# Altium PCB A13-OLinuXino-MICRO_Rev_B_saved.PcbDoc (part 2 of 4)
Units mil, origin at the board's own origin, x right, y up, seen from the top; angles counter-clockwise.
Board outline 3950 x 3350 mil, 4 copper layers (Top, Route2, Route15, Bottom), stack 64.567 mil thick; 262 components, 264 nets, 1099 pads, 476 vias.
Unrouted connection lines stored in the file: 19.
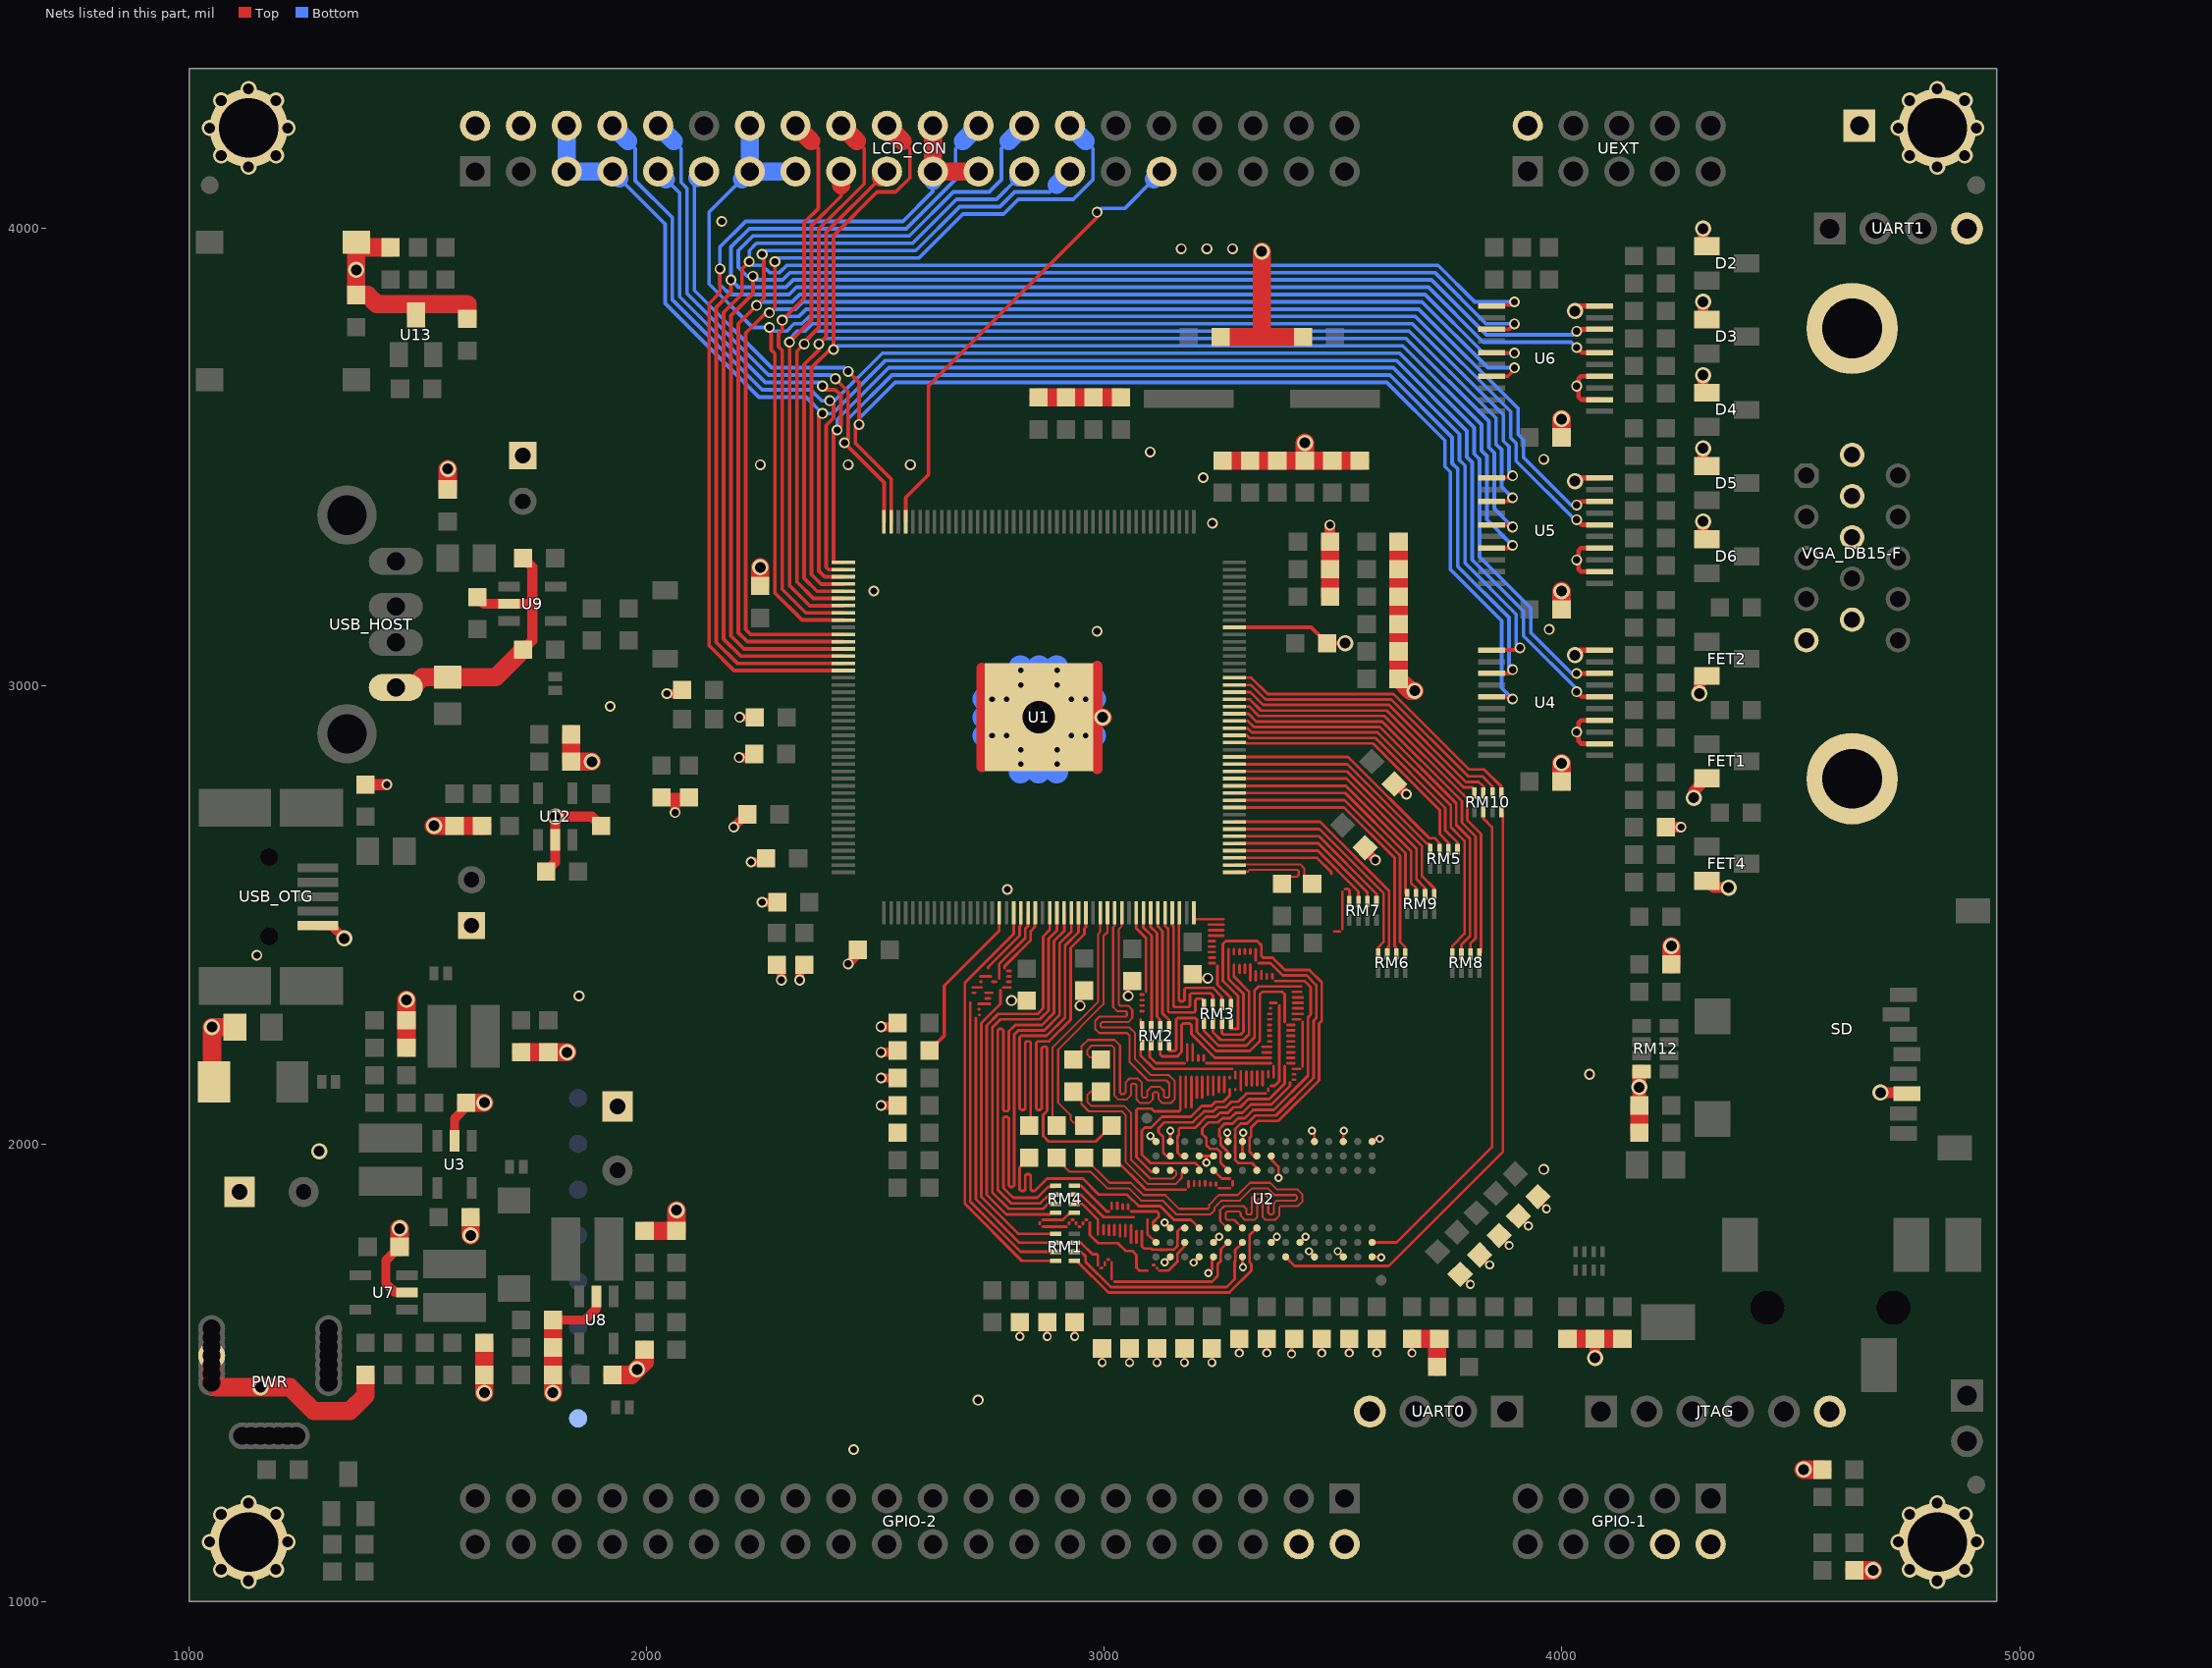
[diagram p4: the nets of this part, all layers, seen from the top]

## Via types
v1: diameter 23.75/23.75/23.75/23.75 (per signal layer), hole 15.75, Top to Bottom, 263 vias
v2: diameter 35.43/31.62/31.62/35.43 (per signal layer), hole 23.62, Top to Bottom, 120 vias
v3: diameter 19.81/19.81/19.81/19.81 (per signal layer), hole 11.81, Top to Bottom, 48 vias
v4: diameter 18/18/18/18 (per signal layer), hole 10, Top to Bottom, 41 vias
v5: diameter 169.92/137.92/137.92/169.92 (per signal layer), hole 129.92, Top to Bottom, 4 vias

## Nets (pads, with @x,y where several pads share a name; then routed paths per layer and width w, separated by ;. In a path a pad name is that pad's centre, name@x,y a point inside that pad or via, vN(x,y) a via of type N, cw(c..) or ccw(c..) an arc to the next point about the centre after c; other vN are vias at no path point) (continued)
D1: RM3.4.2 U2.F7 | length 953.6
  Top w5: 3222.84,1997.13 3222.84,2013.17 ; 3230.72,1989.26 3246.07,1989.26 ; 3254.34,1957.76 3254.34,1980.99
  Top w6: RM3.4.2@3217.47,2263.82 3217.47,2246.53 3249,2215 3310,2215 3328,2233 3328,2335 3337,2344 3429.5,2344 ; 3222.84,1997.13 3230.72,1989.26 ; 3222.84,2013.17 3214,2022.02 3214,2033.31 3227.69,2047 3248.61,2047 3257.61,2056 3275.2,2056 3287.2,2068 3302,2068 3320,2086 3365.3,2086 3406,2126.7 3406,2134 ; 3246.07,1989.26 3254.34,1980.99 ; 3254.34,1957.76 U2.F7@3270.09,1942.01 ; 3411.5,2284 3433,2284 ; 3412,2140 3416.5,2140 ; 3412,2152 3416.5,2152 ; 3412,2164 3427,2164 ; 3412,2296 3433,2296 ; 3412,2308 3433,2308 ; 3412,2320 3433,2320 ; 3412,2332 3429.5,2332 ; 3412.5,2272 3427,2272 ; 3433,2170 3433,2266
D2: RM1.2.2 U2.F2 | length 445.7
  Top w5: 3254.34,1744.18 3254.34,1760.91
  Top w6: RM1.2.2@2934.18,1783.84 2949.16,1783.84 2974,1759 2983,1759 2986,1756 2986,1735 ; 2992,1729 2995,1729 ; 3001,1735 3001,1741 ; 3007,1747 3010,1747 ; 3016,1705 3016,1741 ; 3022,1699 3235,1699 3247.45,1711.45 3247.45,1737.29 3254.34,1744.18 ; 3254.34,1760.91 3254.34,1769.34 3269.54,1784.54 U2.F2@3270.09,1784.53
D3: RM3.3.2 U2.F8 | length 986
  Top w5: 3254.34,1997.53 3254.34,2013.12
  Top w6: RM3.3.2@3237.16,2263.82 3237.16,2243.84 3254,2227 3304,2227 3316,2239 3316,2333 3283,2366 3283,2390.6 ; 3254.34,1997.53 3270.09,1981.78 U2.F8@3270.09,1973.51 ; 3254.34,2013.12 3251.19,2016.27 3251.19,2032.6 3262.59,2044 3280.2,2044 3292.2,2056 3307,2056 3325,2074 3370.29,2074 3445,2148.71 3445,2276.5 3451,2282.5 3451,2342 3437,2356 3373,2356 ; 3295,2374 3295,2390.6 ; 3307,2374 3307,2392 ; 3319,2357.5 3319,2392 ; 3331,2357.5 3331,2377 ; 3343,2362 3343,2377 ; 3355,2362 3355,2371 ; 3367,2362 3367,2371
D4: RM1.4.2 U2.H3 | length 536.7
  Top w5: 3317.33,1745.17 3317.33,1760.91 ; 3317.33,1776.66 3317.33,1792.41
  Top w6: RM1.4.2@2934.18,1744.47 2939.53,1744.47 3009,1675 3273.15,1675 3321.07,1722.92 3321.07,1737.49 3317.33,1741.23 3317.33,1745.17 ; 3317.33,1760.91 3317.33,1776.66 ; 3317.33,1792.41 3317.33,1800.28 U2.H3@3333.08,1816.03
D5: RM3.1.2 U2.H8 | length 978.9
  Top w5: 3317.33,1997.13 3317.33,2011.78 ; 3320.48,2018.5 3320.48,2033.12
  Top w6: RM3.1.2@3276.53,2263.82 3276.53,2251.47 3277,2251 3292,2251 3292,2323 3259,2356 3259,2437 3265,2443 3334,2443 3343,2434 3343,2410.5 3346.5,2407 3367.5,2407 3394.5,2380 3448,2380 3475,2353 3475,2269 3469,2263 3469,2138.7 3380.3,2050 3335.06,2050 3320.48,2035.43 3320.48,2033.12 ; 3317.33,1997.13 3317.33,1982.67 3326.49,1973.51 U2.H8@3333.08,1973.51 ; 3317.33,2011.78 3317.33,2013.22 3320.48,2016.37 3320.48,2018.5
D6: RM1.3.2 U2.G2 | length 483.7
  Top w5: 3285.83,1744.18 3285.83,1760.91
  Top w6: RM1.3.2@2934.18,1764.16 2948.84,1764.16 2959,1754 2959,1742 3014,1687 3267,1687 3284.46,1704.46 3284.46,1742.8 3285.83,1744.18 ; 3285.83,1760.91 3285.83,1767.83 3301.58,1783.58 U2.G2@3301.59,1784.53
D7: RM3.2.2 U2.H7 | length 1025.4
  Top w5: 3285.83,1965.17 3285.83,1981.39 ; 3285.83,1997.13 3285.83,2012.88 ; 3285.83,2018.49 3285.83,2030.64 ; 3293.24,1957.76 3317.33,1957.76
  Top w6: RM3.2.2@3256.84,2263.82 3256.84,2242.16 3260,2239 3298,2239 3304,2245 3304,2328 3271,2361 3271,2425 ; 3283,2414.6 3283,2425 ; 3285.83,1965.17 3293.24,1957.76 ; 3285.83,1981.39 3285.83,1997.13 ; 3285.83,2012.88 3285.83,2018.49 ; 3285.83,2030.64 3285.83,2032.66 3297.17,2044 3312,2044 3330,2062 3375.3,2062 3457,2143.7 3457,2269 3463,2275 3463,2347 3442,2368 3389.5,2368 3362.5,2395 3337,2395 ; 3295,2414.6 3295,2425 ; 3307,2416 3307,2425 ; 3317.33,1957.76 3322.74,1957.76 3333.08,1947.42 U2.H7@3333.08,1942.01 ; 3319,2416 3319,2425 ; 3331,2401 3331,2425
D8: RM2.3.2 U2.D7 | length 975.1
  Top w5: 3105.52,1957.76 3120.48,1957.76 ; 3136.23,1957.76 3151.98,1957.76 ; 3167.72,1957.76 3183.47,1957.76
  Top w6: RM2.3.2@3102.16,2215.82 3102.16,2209.16 3099.2,2206.2 3099.2,2189.8 3113,2176 3175,2176 ; 3105.52,1957.76 3100.8,1957.76 3082,1976.56 3082,2029 3088.3,2035.3 3102.3,2035.3 3126,2059 3188.69,2059 3212.69,2083 3233.6,2083 3242.6,2092 3260.2,2092 3274,2105.8 3274,2119 ; 3120.48,1957.76 3136.23,1957.76 ; 3151.98,1957.76 3167.72,1957.76 ; 3181,2182 3181,2217 ; 3183.47,1957.76 3198.74,1957.76 3207.09,1949.41 U2.D7@3207.1,1942.01 ; 3193,2182 3193,2217 ; 3205,2182 3205,2193.5 ; 3217,2182 3217,2193.5 ; 3223,2176 3364,2176 ; 3286,2117.5 3286,2119 ; 3298,2117.5 3298,2158 ; 3310,2128 3310,2158 ; 3322,2128 3322,2158 ; 3334,2128 3334,2158 ; 3346,2128 3346,2158 ; 3358,2145.4 3358,2158 ; 3370,2145.4 3370,2170
D9: RM4.3.2 U2.C3 | length 437.2
  Top w5: 3104.23,1768.79 3120.48,1768.79 ; 3136.23,1768.79 3151.58,1768.79 ; 3159.85,1777.06 3159.85,1792.41
  Top w6: RM4.3.2@2934.18,1869.16 2950.84,1869.16 2986,1834 2986,1803 ; 2998,1803 2998,1822 ; 3010,1801 3010,1822 ; 3022,1801 3022,1822 ; 3034,1798 3034,1822 ; 3046,1798 3046,1822 ; 3058,1784 3058,1822 ; 3070,1784 3070,1809 ; 3082,1809 3082,1776 3087,1771 3102.02,1771 3104.23,1768.79 ; 3120.48,1768.79 3136.23,1768.79 ; 3151.58,1768.79 3159.85,1777.06 ; 3159.85,1792.41 3160,1792.56 3160,1809 3167.03,1816.03 U2.C3@3175.6,1816.03
D10: RM2.1.2 U2.C8 | length 1057.4
  Top w5: 3159.85,1997.13 3159.85,2012.88
  Top w6: RM2.1.2@3141.53,2215.82 3141.53,2203.47 3142,2203 3154,2203 3157,2206 3157,2272 3160,2275 3199,2275 3202,2272 3202,2245 3244,2203 3317.5,2203 3340,2225.5 3340,2327 3345,2332 3389,2332 3394,2327 3394,2266 ; 3159.85,1997.13 3159.85,1980.65 3166.99,1973.51 U2.C8@3175.6,1973.51 ; 3159.85,2012.88 3159.85,2016.82 3162.61,2019.57 3162.61,2032.11 3165.5,2035 3198.71,2035 3222.71,2059 3243.6,2059 3252.6,2068 3270.19,2068 3282.19,2080 3297,2080 3315,2098 3360.31,2098 3394,2131.69 3394,2170 ; 3400,2176 3415,2176 ; 3400,2188 3415,2188 ; 3400,2200 3415,2200 ; 3400,2212 3415,2212 ; 3400,2224 3415,2224 ; 3400,2236 3415,2236 ; 3400,2248 3415,2248 ; 3400,2260 3415,2260
D11: RM4.4.2 U2.C2 | length 450.1
  Top w5: 3159.85,1743.24 3159.85,1760.52
  Top w6: 2859,1825 2859,1828 ; 2865,1819 2917,1819 ; 2865,1834 2909.5,1834 2924.97,1849.47 RM4.4.2@2934.18,1849.47 ; 2923,1825 2923,1828 ; 2929,1834 2932,1834 ; 2938,1825 2938,1828 ; 2944,1819 2947,1819 ; 2953,1825 2953,1828 ; 2959,1834 2962,1834 ; 2968,1828 2968,1801 2986,1783 3029.5,1783 3046.5,1766 3061,1766 3070,1757 3070,1729.5 3076.5,1723 3094,1723 ; 3106,1735 3109,1735 ; 3115,1728 3115,1729 ; 3120,1723 3139.61,1723 3159.85,1743.24 ; 3159.85,1760.52 3174.02,1774.69 3174.02,1782.96 U2.C2@3175.6,1784.53
D12: RM2.4.2 U2.A7 | length 950.4
  Top w6: RM2.4.2@3082.47,2215.82 3079,2212.35 3079,2193 3108,2164 3279,2164 ; U2.A7@3112.61,1942.01 3109.59,1939 3102,1939 3070,1971 3070,2074 3073,2077 3103,2077 3109,2071 3163,2071 3166,2074 3166,2146 ; 3178,2080 3178,2146 ; 3190,2080 3190,2146 ; 3202,2101 3202,2146 ; 3214,2101 3214,2146 ; 3226,2107 3226,2146 ; 3238,2107 3238,2146 ; 3250,2113.5 3250,2146 ; 3262,2113.5 3262,2146 ; 3274,2143.5 3274,2146 ; 3286,2143.5 3286,2157
D13: RM4.2.2 U2.A2 | length 207.2
  Top w6: RM4.2.2@2934.18,1888.84 2948.66,1888.84 2997.5,1840 3064,1840 ; 3094,1834 3094,1803.14 U2.A2@3112.61,1784.53
D14: RM2.2.2 U2.B8 | length 993
  Top w5: 3128.35,1997.13 3128.35,2012.88
  Top w6: RM2.2.2@3121.84,2215.82 3121.84,2195.16 3126,2191 3159.5,2191 3169,2200.5 3169,2260 3172,2263 3187,2263 3190,2260 3190,2240 3242,2188 3364,2188 ; 3128.35,1997.13 3128.35,1980.65 3135.49,1973.51 U2.B8@3144.11,1973.51 ; 3128.35,2012.88 3128.35,2014.82 3118,2025.17 3118,2034 3131,2047 3193.7,2047 3217.7,2071 3238.6,2071 3247.6,2080 3265.2,2080 3277.2,2092 3292,2092 3310,2110 3352,2110 ; 3346,2200 3364,2200 ; 3346,2212 3364,2212 ; 3358,2116 3358,2121 ; 3358,2224 3364,2224 ; 3358,2236 3364,2236 ; 3358,2248 3364,2248 ; 3358,2260 3364,2260 ; 3358,2272 3364,2272 ; 3358,2284 3364,2284 ; 3362.5,2296 3364,2296 ; 3362.5,2308 3376,2308 ; 3364,2127 3372,2127 3382,2137 3382,2302
D15: RM4.1.2 U2.A3 | length 245.7
  Top w6: RM4.1.2@2934.18,1908.53 2948.47,1908.53 3005,1852 3010,1852 ; 3016,1858 3016,1871 ; 3028,1858 3028,1871 ; 3040,1858 3040,1867 ; 3052,1858 3052,1867 ; 3058,1852 3115,1852 3118.61,1848.39 3118.61,1840.61 3106,1828 3106,1822.64 U2.A3@3112.61,1816.03
DDR3_A0: RM5.1.1 U1.64 | length 628.3
  Top w6: U1.64@3284.17,2892.63 3311.37,2892.63 3317,2887 3592,2887 3745,2734 3745,2685 3771.53,2658.47 RM5.1.1@3771.53,2643.18
DDR3_A1: RM6.3.1 U1.52 | length 539.6
  Top w6: U1.52@3284.17,2703.65 3471.35,2703.65 3622,2553 3622,2432 3618.16,2428.16 RM6.3.1@3618.16,2415.18
DDR3_A2: RM8.3.1 U1.66 | length 908.5
  Top w6: U1.66@3284.17,2924.13 3313.87,2924.13 3327,2911 3602,2911 3769,2744 3769,2697 3799,2667 3799,2454 3780.16,2435.16 RM8.3.1@3780.16,2415.18
DDR3_A3: RM8.4.1 U1.65 | length 890.2
  Top w6: U1.65@3284.17,2908.38 3312.62,2908.38 3322,2899 3597,2899 3757,2739 3757,2692 3787,2662 3787,2459 3760.47,2432.47 RM8.4.1@3760.47,2415.18
DDR3_A4: RM6.4.1 U1.51 | length 521.4
  Top w6: U1.51@3284.17,2687.91 3470.09,2687.91 3610,2548 3610,2441 3598.47,2429.47 RM6.4.1@3598.47,2415.18
DDR3_A5: RM8.2.1 U1.67 | length 926.8
  Top w6: U1.67@3284.17,2939.87 3315.13,2939.87 3332,2923 3607,2923 3781,2749 3781,2702 3811,2672 3811,2449 3799.84,2437.84 RM8.2.1@3799.84,2415.18
DDR3_A6: RM6.2.1 U1.54 | length 606.9
  Top w6: U1.54@3284.17,2735.15 3523.85,2735.15 3634,2625 3634,2432 3637.84,2428.16 RM6.2.1@3637.84,2415.18
DDR3_A7: RM10.2.1 U1.71 | length 670.5
  Top w6: U1.71@3284.17,3002.87 3320.13,3002.87 3352,2971 3627,2971 3795,2803 3826,2803 3847.84,2781.16 RM10.2.1@3847.84,2766.18
DDR3_A8: RM6.1.1 U1.55 | length 631.5
  Top w6: U1.55@3284.17,2750.9 3525.1,2750.9 3646,2630 3646,2441 3657.53,2429.47 RM6.1.1@3657.53,2415.18
DDR3_A9: RM10.4.1 U1.69 | length 614.8
  Top w6: U1.69@3284.17,2971.37 3317.63,2971.37 3342,2947 3617,2947 3785,2779 3805,2779 3808.47,2775.53 RM10.4.1@3808.47,2766.18
DDR3_A10: RM7.3.1 U1.48 | length 330.4
  Top w6: U1.48@3284.17,2640.66 3466.34,2640.66 3555.16,2551.84 RM7.3.1@3555.16,2529.18
DDR3_A11: RM9.4.1 U1.56 | length 520.6
  Top w6: U1.56@3284.17,2766.65 3526.35,2766.65 3658,2635 3658,2547.65 RM9.4.1@3661.47,2544.18
DDR3_A12: RM7.1.1 U1.50 | length 379.7
  Top w6: U1.50@3284.17,2672.16 3468.84,2672.16 3594.53,2546.47 RM7.1.1@3594.53,2529.18
DDR3_A13: RM8.1.1 U1.68 | length 945
  Top w6: U1.68@3284.17,2955.62 3316.38,2955.62 3337,2935 3612,2935 3793,2754 3793,2707 3823,2677 3823,2418.65 RM8.1.1@3819.53,2415.18
DDR3_A14: RM9.3.1 U1.57 | length 545.3
  Top w6: U1.57@3284.17,2782.39 3527.61,2782.39 3670,2640 3670,2570 3681.16,2558.84 RM9.3.1@3681.16,2544.18
DDR3_BA0: RM5.2.1 U1.63 | length 603.7
  Top w6: U1.63@3284.17,2876.88 3309.12,2876.88 3311,2875 3587,2875 3733,2729 3733,2677 3751.84,2658.16 RM5.2.1@3751.84,2643.18
DDR3_BA1: RM7.2.1 U1.49 | length 355.1
  Top w6: U1.49@3284.17,2656.41 3467.59,2656.41 3574.84,2549.16 RM7.2.1@3574.84,2529.18
DDR3_BA2: RM5.3.1 U1.61 | length 540.3
  Top w6: U1.61@3284.17,2845.39 3532.61,2845.39 3710,2668 3722,2668 3732.16,2657.84 RM5.3.1@3732.16,2643.18
DDR3_CAS: RM9.1.1 U1.59 | length 594.5
  Top w6: U1.59@3284.17,2813.89 3530.11,2813.89 3694,2650 3694,2585 3720.53,2558.47 RM9.1.1@3720.53,2544.18
DDR3_CK: R71.2 U1.45 | length 197.6
  Top w4.5: U1.45@3284.17,2593.42 3284.58,2593 3286.58,2595 3313,2595 3317,2599 3421.5,2599 3424.5,2596 3424.5,2587 3421.5,2584 3404,2584 R71.2@3388,2568
DDR3_CK_N: R70.2 U1.46 | length 198.1
  Top w4.5: U1.46@3284.17,2609.17 3286,2611 3427.5,2611 3437,2601.5 3437,2585 R70.2@3454,2568
DDR3_CKE: RM7.4.1 U1.47 | length 357.5
  Top w6: U1.47@3284.17,2624.91 3465.09,2624.91 3496,2594 3496,2590 ; 3502,2464 3514,2464 ; 3520,2470 3520,2551 ; 3526,2557 3533,2557 3535.47,2554.53 RM7.4.1@3535.47,2529.18
DDR3_D0: RM1.1.1 U1.22 | length 851.2
  Top w6: 2773,2336 2773,2306 2731,2264 2731,1884 2811.47,1803.53 RM1.1.1@2893.82,1803.53 ; 2779,2342 2795,2342 ; 2782,2384 2782,2388 2839,2445 2839,2465 2848,2474 2848,2482 2849.13,2483.13 U1.22@2849.13,2504.83 ; 2788,2354 2795,2354 ; 2788,2366 2795,2366 ; 2788,2378 2795,2378
DDR3_D1: RM3.4.1 U1.40 | length 334.5
  Top w6: U1.40@3132.59,2504.83 3132.59,2476.41 3139,2470 3139,2290 3142,2287 3196,2287 3199,2290 3199,2314 3202,2317 3214,2317 3217.47,2313.53 RM3.4.1@3217.47,2304.18
DDR3_D2: RM1.2.1 U1.21 | length 839.3
  Top w6: 2719,2275 2719,1879 2814.16,1783.84 RM1.2.1@2893.82,1783.84 ; 2725,2294 2727,2294 ; 2725,2306 2750,2306 ; 2726,2282 2727,2282 ; 2741,2318 2750,2318 ; 2741,2330 2755,2330 ; 2755,2354 2763,2354 ; 2770,2361 2770,2393 2827,2450 2827,2470 2833,2476 2833,2504.46 U1.21@2833.38,2504.83
DDR3_D3: RM3.3.1 U1.41 | length 339.6
  Top w6: U1.41@3148.34,2504.83 3148.34,2477.66 3151,2475 3151,2302 3154,2299 3184,2299 3187,2302 3187,2326 3190,2329 3232,2329 3237.16,2323.84 RM3.3.1@3237.16,2304.18
DDR3_D4: RM1.4.1 U1.19 | length 930.5
  Top w6: U1.19@2801.88,2504.83 2801.88,2458.88 2695,2352 2695,1869 2819.53,1744.47 RM1.4.1@2893.82,1744.47
DDR3_D5: RM3.1.1 U1.44 | length 327.7
  Top w6: U1.44@3195.58,2504.83 3195.58,2491 3260,2491 ; 3229,2419 3241,2419 ; 3229,2431 3241,2431 ; 3229,2443 3241,2443 ; 3229,2455 3260,2455 ; 3229,2467 3260,2467 ; 3229,2479 3260,2479 ; 3229.3,2395 3241,2395 ; 3229.3,2407 3241,2407 ; 3247,2389 3247,2348 3276.53,2318.47 RM3.1.1@3276.53,2304.18
DDR3_D6: RM1.3.1 U1.20 | length 863.8
  Top w6: 2707,2308 2707,1874 2816.84,1764.16 RM1.3.1@2893.82,1764.16 ; 2713,2330 2717,2330 ; 2713,2342 2731,2342 ; 2729,2354 2731,2354 ; 2729,2366 2752,2366 ; 2746,2384 2746,2386 2815,2455 2815,2475 2817,2477 2817,2504.2 U1.20@2817.63,2504.83
DDR3_D7: RM3.2.1 U1.42 | length 338
  Top w6: U1.42@3164.09,2504.83 3164.09,2483.09 3163,2482 3163,2314 3166,2311 3172,2311 3175,2314 3175,2338 3178,2341 3237,2341 3256.84,2321.16 RM3.2.1@3256.84,2304.18
DDR3_D8: RM2.3.1 U1.37 | length 256.3
  Top w6: U1.37@3085.35,2504.83 3085.35,2472.65 3103,2455 3103,2257.02 RM2.3.1@3102.16,2256.18
DDR3_D9: RM4.3.1 U1.25 | length 878.1
  Top w6: RM4.3.1@2893.82,1869.16 2877.16,1869.16 2866,1858 2791,1858 2755,1894 2755,2254 2773,2272 2859,2272 2878,2291 2878,2448 2896.37,2466.37 U1.25@2896.37,2504.83
DDR3_D10: RM2.1.1 U1.39 | length 258.9
  Top w6: U1.39@3116.84,2504.83 3116.84,2475.16 3127,2465 3127,2285 3141.53,2270.47 RM2.1.1@3141.53,2256.18
DDR3_D11: RM4.4.1 U1.24 | length 893.3
  Top w6: U1.24@2880.62,2504.83 2880.62,2467.62 2866,2453 2866,2296 2854,2284 2768,2284 2743,2259 2743,1889 2786,1846 2880,1846 2883.47,1849.47 RM4.4.1@2893.82,1849.47
DDR3_D12: RM2.4.1 U1.36 | length 223
  Top w6: U1.36@3069.6,2504.83 3069.6,2471.4 3091,2450 3091,2332 ; 3079,2272 3079,2259.65 RM2.4.1@3082.47,2256.18 ; 3079,2290 3085,2290 ; 3079,2302 3085,2302 ; 3079,2314 3085,2314 ; 3079,2326 3085,2326
DDR3_D13: RM4.2.1 U1.26 | length 1212.9
  Top w6: RM4.2.1@2893.82,1888.84 2878.84,1888.84 2860,1870 2796,1870 2767,1899 2767,2248 2770,2251 2776,2251 2779,2248 2779,2074.5 2782,2071.5 2788,2071.5 2791,2074.5 2791,2245.5 2805.5,2260 2864,2260 2890,2286 2890,2443 2912.12,2465.12 U1.26@2912.12,2504.83
DDR3_D14: RM2.2.1 U1.38 | length 257.2
  Top w6: U1.38@3101.09,2504.83 3101.09,2473.91 3115,2460 3115,2278 3121.84,2271.16 RM2.2.1@3121.84,2256.18
DDR3_D15: RM4.1.1 U1.27 | length 1144.8
  Top w6: RM4.1.1@2893.82,1908.53 2891.3,1906 2877,1906 2853,1882 2801,1882 2779,1904 2779,2056.5 2782,2059.5 2788,2059.5 2791,2056.5 2791,1909 2794,1906 2800,1906 2803,1909 2803,2239 2812,2248 2869,2248 2902,2281 2902,2438 2927.87,2463.87 U1.27@2927.87,2504.83
DDR3_DM0: R64.2 U1.29 | length 1013.5
  Top w6: U1.29@2959.36,2504.83 2959.36,2473.36 2956.36,2470.36 2956.36,2458.36 2926,2428 2926,2271 2879,2224 2854,2224 2851,2221 2851,2077 2854,2074 2860,2074 2863,2077 2863,2209 2866,2212 2872,2212 2875,2209 2875,2072 2866,2063 2866,2017 2878,2005 2981,2005 R64.2@3016,2040
DDR3_DM1: R65.2 U1.28 | length 869.1
  Top w6: R65.2@2836,2040 2839,2043 2839,2221 2836,2224 2830,2224 2827,2221 2827,2077 2824,2074 2818,2074 2815,2077 2815,2233 2818,2236 2874,2236 2914,2276 2914,2433 2943.61,2462.61 U1.28@2943.61,2504.83
DDR3_DQS0: R63.2 U1.31 | length 511.6
  Top w4.5: R63.2@2896,2040 2887,2049 2887,2211 2986,2310 2986,2458 2990.86,2462.86 U1.31@2990.86,2504.83
DDR3_DQS0_N: R62.2 U1.32 | length 543
  Top w4.5: R62.2@2956,2040 2950,2046 2933,2046 2926,2053 2926,2063 2899,2090 2899,2206 2998,2305 2998,2454 3006.61,2462.61 U1.32@3006.61,2504.83
DDR3_DQS1: R69.2 U1.33 | length 1054.1
  Top w4.5: R69.2@2932,2184 2950,2202 2950,2213 2964,2227 3022,2227 3034,2215 3034,2112.1 3037,2109.1 3043,2109.1 3046,2112.1 3046,2134 3055,2143 3073,2143 3082,2134 3082,2104 3085,2101 3091,2101 3094,2104 3094,2116 3103,2125 3121,2125 3130,2116 3130,2104 3133,2101 3139,2101 3142,2104 3142,2132 3135.5,2138.5 3095.5,2138.5 3055,2179 3055,2236.5 3049.5,2242 2989,2242 2980,2251 2980,2269 2989,2278 3046.5,2278 3049,2280.5 3049,2287.5 3046.5,2290 3028,2290 3019,2299 3019,2473.5 3022.35,2476.85 U1.33@3022.35,2504.83
DDR3_DQS1_N: R66.2 U1.34 | length 1069.1
  Top w4.5: R66.2@2992,2184 2987.3,2188.7 2969,2188.7 2963,2194.7 2963,2205.5 2972.5,2215 3016,2215 3022,2209 3022,2105.1 3030,2097.1 3049,2097.1 3058,2106.1 3058,2128 3061,2131 3067,2131 3070,2128 3070,2097 3078,2089 3097.5,2089 3106,2097.5 3106,2110 3109,2113 3115,2113 3118,2110 3118,2098 3127,2089 3145,2089 3154,2098 3154,2137 3140.5,2150.5 3101.5,2150.5 3067,2185 3067,2242 3055,2254 2995,2254 2992,2257 2992,2263 2995,2266 3052,2266 3061,2275 3061,2293 3052,2302 3034,2302 3031,2305 3031,2468.5 3038.1,2475.6 U1.34@3038.1,2504.83
DDR3_ODT: RM10.1.2 U2.K1 | length 1330.8
  Top w6: U2.K1@3396.07,1753.04 3415.76,1733.35 3621.35,1733.35 3871,1983 3871,2722.35 RM10.1.2@3867.53,2725.82
DDR3_ODTT: RM10.1.1 U1.72 | length 696.3
  Top w6: U1.72@3284.17,3018.61 3321.39,3018.61 3357,2983 3632,2983 3797,2818 3830,2818 3867.53,2780.47 RM10.1.1@3867.53,2766.18
DDR3_RAS: RM9.2.1 U1.58 | length 569.9
  Top w6: U1.58@3284.17,2798.14 3528.86,2798.14 3682,2645 3682,2578 3700.84,2559.16 RM9.2.1@3700.84,2544.18
DDR3_RST: RM10.3.2 U2.T2 | length 1088.9
  Top w6: U2.T2@3585.05,1784.53 3638.54,1784.54 3847,1993 3847,2692 3828.16,2710.84 RM10.3.2@3828.16,2725.82
DDR3_RSTT: RM10.3.1 U1.70 | length 644.1
  Top w6: U1.70@3284.17,2987.12 3318.88,2987.12 3347,2959 3622,2959 3790,2791 3818,2791 3828.16,2780.84 RM10.3.1@3828.16,2766.18
DDR3_WE: RM5.4.1 U1.60 | length 511
  Top w6: U1.60@3284.17,2829.64 3531.36,2829.64 3705,2656 3709,2656 3712.47,2652.53 RM5.4.1@3712.47,2643.18
DQM0: R64.1 U2.E7 | length 318.9
  Top w6: R64.1@3016,1970 3020,1970 3090,1900 3178,1900 ; 3184,1906 3184,1918 ; 3196,1909 3196,1918 ; 3208,1909 3208,1918 ; 3220,1909 3220,1918 ; 3232,1909 3232,1915 ; U2.E7@3238.59,1942.01 3256.61,1924 3274.5,1924 ; 3244,1909 3244,1915 ; 3250,1903 3274.5,1903 ; 3280.5,1909 3280.5,1918
DQM1: R65.1 U2.D3 | length 594.9
  Top w6: R65.1@2836,1970 2815,1949 2815,1900 2818,1897 2824,1897 2827,1900 2827,1931 2830,1934 2836,1934 2839,1931 2839,1900 2842,1897 2848,1897 2875,1924 2953,1924 2988,1889 3050,1889 3075,1864 3122,1864 3152,1834 3189.13,1834 U2.D3@3207.1,1816.03
DQS0: R63.1 U2.F3 | length 952.6
  Top w4.5: R63.1@2896,1970 2896,1966.5 2923.5,1939 2970,1939 3006,1903 3053,1903 3080,1876 3127,1876 3157,1846 3232,1846 3241,1855 3241,1861 3256,1876 3296,1876 3323,1903 3357,1903 3372,1888 3417.5,1888 3421,1884.5 3421,1879.5 3417.5,1876 3376,1876 3370,1870 3370,1849 3367,1846 3361,1846 3358,1849 3358,1882.1 3349,1891.1 3331,1891.1 3322,1882.1 3322,1848.7 3319,1845.7 3313,1845.7 3310,1848.7 3310,1858 3304,1864 3262,1864 3253,1855 3253,1831.5 3268.47,1816.03 U2.F3@3270.09,1816.03
DQS0_N: R62.1 U2.G3 | length 921.1
  Top w4.5: R62.1@2956,1970 3011,1915 3058,1915 3085,1888 3133,1888 3163,1858 3226,1858 3229,1861 3229,1867 3250,1888 3291,1888 3318,1915 3362,1915 3377,1900 3422.5,1900 3433,1889.5 3433,1874.5 3422.5,1864 3385,1864 3382,1861 3382,1843 3373,1834 3352,1834 3346,1840 3346,1876.1 3343,1879.1 3337,1879.1 3334,1876.1 3334,1839.7 3328,1833.7 3307,1833.7 3298,1842.7 3298,1849 3295,1852 3268,1852 3265,1849 3265,1837 3268,1834 3283.61,1834 U2.G3@3301.59,1816.03
DQS1: R69.1 U2.C7 | length 410.2
  Top w4.5: R69.1@2932,2114 2950,2096 2950,2087 2966,2071 3038,2071 3046,2063 3046,1961 3095,1912 3155,1912 3169.25,1926.25 3169.25,1935.67 U2.C7@3175.6,1942.01
DQS1_N: R66.1 U2.B7 | length 395.4
  Top w4.5: R66.1@2992,2114 2970,2114 2963,2107 2963,2091 2971,2083 3043,2083 3058,2068 3058,1966 3100,1924 3149.5,1924 3156.75,1931.25 3156.75,1939.25 3153.98,1942.02 U2.B7@3144.11,1942.01
DZQ: R8.2 U1.17 | length 364
  Top w6: 2650,2344.5 2650,2346 2770.39,2466.39 U1.17@2770.39,2504.83
  Top w8: R8.2@2618,2204 2650,2236 2650,2344.5
GND: C1.1 C2.1 C3.1 C4.1 C5.1 C6.1 C7.1 C8.1 C9.1 C10.1 C11.1 C12.1 C13.1 C14.1 C15.1 C16.1 C17.1 C18.1 C19.1 C20.1 C21.1 C22.1 C23.1 C24.2 C25.2 C26.2 C27.2 C28.2 C29.2 C30.2 C31.2 C32.2 C33.1 C34.1 C35.1 C36.1 C37.1 C38.1 C39.1 C40.1 C41.1 C43.1 C44.2 C45.2 C46.2 C47.2 C48.2 C49.2 C50.2 C51.2 C52.2 C53.- C54.- C58.1 C59.1 C60.1 C61.1 C62.1 C63.1 C64.1 C65.1 C66.1 C67.1 C68.1 C69.1 C70.1 C71.1 C72.1 C73.1 C74.2 C76.2 C77.2 C78.2 C79.2 C80.2 C82.2 C83.2 C84.2 C85.2 C86.2 C87.2 C88.2 C90.2 C91.2 C92.2 C93.2 C94.2 C95.2 C97.2 C98.2 C100.2 C101.- C102.- C103.2 C104.2 D2.1 D3.1 D4.1 D5.1 D6.1 D8.A FET1.2 FET2.2 FET4.2 GND_PIN.P$1 GPIO-1.2 GPIO-1.4 GPIO-2.2 GPIO-2.4 JTAG.6 L6.1 L8.1 LCD_CON.2 LCD_CON.4 P0.1 PWR.- PWR_LED.C R4.2 R8.1 R10.1 R11.1 R12.1 R14.2 R21.2 R38.1 R41.2 R44.2 R46.2 R51.1 R52.2 R58.1 R59.1 R61.1 R67.1 R68.1 RM12.4.1 SD.6 U1.79 U1.GND_PAD U1.P$2 U1.P$3 U1.P$4 U1.P$5 U1.P$6 U1.P$7 U1.P$8 U1.P$9 U1.P$10 U1.P$11 U1.P$12 U1.P$13 U1.P$14 U1.P$15 U1.P$16 U1.P$17 U1.P$18 U2.A9 U2.B1 U2.B3 U2.B9 U2.D1 U2.D8 U2.E1 U2.E2 U2.E8 U2.F9 U2.G1 U2.G8 U2.G9 U2.J2 U2.J8 U2.L2 U2.M1 U2.M9 U2.P1 U2.P9 U2.T1 U2.T9 U3.2 U4.2 U4.4 U4.10 U5.2 U5.4 U5.10 U6.2 U6.4 U6.10 U7.2 U8.2 U9.2 U12.2 U13.3 UART0.4 UART1.4 UBOOT.P$1 UEXT.2 USB_HOST.4 USB_OTG.GND VGA_DB15-F.5 VGA_DB15-F.6 VGA_DB15-F.7 VGA_DB15-F.8 VGA_DB15-F.10 VGA_DB15-F.GND1 VGA_DB15-F.GND2 | length 11033
  Top w5: v4(3380.32,1925.33) 3380.32,1950
  Top w6: v4(3100.4,2017.21) U2.A9@3112.61,2005 ; v4(3131.9,1740.83) U2.B1@3144.11,1753.04 ; v4(3131.9,1828.24) U2.B3@3144.11,1816.03 ; U2.B9@3144.11,2005 v4(3144.1,2028.63) ; v4(3195,1740.55) 3207.09,1752.65 U2.D1@3207.1,1753.04 ; U2.D8@3207.1,1973.51 3222.84,1973.51 ; v4(3222.84,1958.94) 3222.84,1973.51 ; v4(3226.83,1717.61) 3235.05,1725.83 3235.05,1749.5 U2.E1@3238.59,1753.04 ; U2.E2@3238.59,1784.53 v4(3250.9,1796.85) ; U2.E8@3238.59,1973.51 3222.84,1973.51 ; v4(3268.51,2024.39) 3268.51,2006.58 U2.F9@3270.09,2005 ; U2.G1@3301.59,1753.04 3301.58,1731.58 v4(3302.76,1730.4) ; U2.G8@3301.59,1973.51 U2.G9@3301.59,2005 3303.16,2006.58 v4(3303.16,2024.48) ; U2.J2@3364.58,1784.53 v4(3376.78,1796.74) ; U2.J8@3364.58,1973.51 3364.57,1965.74 3380.32,1950 ; U2.L2@3427.57,1784.53 v4(3439.77,1796.74) ; v4(3446.86,1765.24) U2.M1@3459.07,1753.04 ; v4(3453.19,2028.89) 3459.06,2023.01 U2.M9@3459.07,2005 ; v4(3509.85,1765.24) U2.P1@3522.06,1753.04 ; U2.P9@3522.06,2005 3522.06,2027.45 v4(3523.24,2028.63) ; U2.T1@3585.05,1753.04 3603.55,1753.04 v4(3604.73,1751.86) ; U2.T9@3585.05,2005 3591.04,2011 v4(3601.5,2011) ; C26.2@3777.62,1714.94 v3(3799.54,1693.02) ; C52.2@3820.05,1757.37 v3(3841.97,1735.45) ; C31.2@3862.47,1799.8 v3(3884.39,1777.88) ; C32.2@3904.9,1842.22 v3(3926.82,1820.3) ; R11.1@3947.33,1884.65 3947.33,1876.67 v3(3966,1858)
  Top w8: v3(2815,1579) C45.2@2815,1610 ; v3(2875,1579) C47.2@2875,1610 ; v3(2935,1579) C25.2@2935,1610 ; v3(2995,1522) C49.2@2995,1553 ; v3(3055,1522) C24.2@3055,1553 ; v3(3115,1522) C44.2@3115,1553 ; v3(3175,1522) C46.2@3175,1553 ; v3(3235,1522) C48.2@3235,1553 ; v3(3295,1543) C50.2@3295,1574 ; v3(3355,1543) C27.2@3355,1574 ; v3(3409,1541) 3409,1568 C51.2@3415,1574 ; v3(3475,1543) C28.2@3475,1574 ; v3(3535,1543) C29.2@3535,1574 ; v3(3595,1543) C30.2@3595,1574 ; v3(3672,1543) R12.1@3672,1574 ; C60.1@3727,1574 C60.1@3732,1574
  Top w9: v1(2797,2313) C10.1@2830,2313 ; v1(2947,2302) 2947,2326 C11.1@2956,2335 ; v1(3052,2323) 3052,2347 C7.1@3061,2356 ; C12.1@3193,2371 3202,2362 v1(3226,2362) ; U1.79@3284.17,3128.85 3452.15,3128.85 C58.1@3487,3094 v2(3526,3094)
  Top w10: v1(4032,2900) v1@4036,2900 ; v1(4032,3276) v1@4036,3276 ; v1(4032,3656) v1@4036,3656 ; U4.2@4082.11,2874.43 4041.57,2874.43 4036,2880 v1@4036,2900 ; U4.4@4082.11,2925.61 4041.61,2925.61 4036,2920 v1@4036,2900 ; U5.2@4082.11,3250.43 4041.57,3250.43 4036,3256 v1@4036,3276 ; U5.4@4082.11,3301.61 4041.61,3301.61 4036,3296 v1@4036,3276 ; U6.2@4082.11,3626.43 4041.57,3626.43 4036,3632 v1@4036,3656 ; U6.4@4082.11,3677.61 4041.61,3677.61 4036,3672 v1@4036,3656
  Top w12: v2(4028,3068) 4039.16,3079.16 U4.10@4082.11,3079.16 ; v2(4028,3448) 4035.16,3455.16 U5.10@4082.11,3455.16 ; v2(4028,3820) 4039.16,3831.16 U6.10@4082.11,3831.16
  Top w16: v1(2203,2932) C5.1@2236,2932
  Top w20: USB_OTG.GND@1281.54,2477.01 1310.99,2477.01 v2(1339,2449) ; C80.2@1460,1775 1430,1745 1430,1695 1450,1675 U7.2@1476.19,1675 ; U3.2@1580,2006.19 1580,2055 1605,2080 R21.2@1605,2090 ; R44.2@1795,1615 1865,1615 1890,1640 U8.2@1890,1666.19 ; C35.1@2032,2757 2062,2757 ; v1(2044,2984) 2069,2984 C9.1@2077,2992 ; v1(2062,2724) 2062,2757 ; C19.1@2092,2757 2062,2757 ; v1(2190,2692) 2218,2720 C6.1@2220,2720 ; v1(2202,2844) 2227,2844 C16.1@2235,2852 ; v1(2228,2616) 2253,2616 C20.1@2261,2624 ; v1(2252,2528) C3.1@2285,2528 ; C17.1@2284,2391 2294,2381 v1(2294,2358) ; v1(2334,2358) 2334,2381 C4.1@2344,2391 ; v1(2440,2393) 2461,2414 C1.1@2461,2424 ; v1(2512,2084) R10.1@2548,2084 ; v1(2512,2144) C43.1@2548,2144 ; v1(2512,2200) 2544,2200 R8.1@2548,2204 ; v1(2512,2256) 2540,2256 C18.1@2548,2264 ; C13.1@3569.75,2647.25 3569.75,2642.25 v1(3592,2620) ; C14.1@3633.75,2786.25 3637.75,2786.25 v1(3660,2764)
  Top w22: R59.1@1630,3195 1645,3180 U9.2@1698.81,3180 1750,3180 ; R61.1@1730,3080 1750,3100 1750,3180 ; C98.2@1730,3280 1750,3260 1750,3180 ; R68.1@1780,2595 1800,2615 U12.2@1800,2663.81 v2(1800,2715) 1880,2715 R67.1@1900,2695
  Top w24: C100.2@1385,2785 v1(1432,2785) ; 2732,2824 2732,2932 ; 2732,3040 2732,2932 ; U1.P$2@2857,2932 U1.P$2@2856,2932 ; 2984,2820 v2@2984,2932 ; 2984,3044 v2@2984,2932 ; R4.2@3493,3316 v1(3493,3352) ; v2(4072,1532) C67.1@4072,1574 ; R38.1@4227,2692 v1(4260,2692) ; v2(4288,2756) 4288,2769.91 FET1.2@4316.69,2798.6 ; v2(4300,2984) 4300,3005.91 FET2.2@4316.69,3022.6 ; v2(4308,3360) 4308,3321.4 D6.1@4316.69,3321.4 ; v2(4308,3520) 4308,3481.4 D5.1@4316.69,3481.4 ; v2(4308,3680) 4308,3641.4 D4.1@4316.69,3641.4 ; v2(4308,3840) 4308,3801.4 D3.1@4316.69,3801.4 ; v2(4308,4000) 4308,3961.4 D2.1@4316.69,3961.4 ; FET4.2@4316.69,2574.6 4331.29,2560 v2(4364,2560) ; v2(4696,2112) 4751.58,2112 SD.6@4754.13,2109.45 ; 2732,2932 U1.P$2@2856,2932 ; U1.P$2@2856,2932 v2@2984,2932
  Top w30: C72.1@4169,2084 v2(4169,2124) 4169,2158 RM12.4.1@4174,2158
  Top w40: PWR.-@1049.09,1537.01 1049.09,1478.91 1060,1468 v2(1156,1468) 1220,1468 1272,1416 1351,1416 1385,1450 R41.2@1385,1495 ; D8.A@1054.29,2135 1050,2135 v2(1050,2255) L8.1@1100,2255 ; UBOOT.P$1@1365,3970 UBOOT.P$1@1365,3959 ; C103.2@1440,3959 UBOOT.P$1@1365,3959 ; USB_HOST.4@1451.69,2997.2 1487.2,2997.2 1510,3020 L6.1@1565,3020 1670,3020 R61.1@1730,3080 ; C80.2@1460,1775 v2(1460,1815) ; C76.2@1475,2210 C77.2@1475,2270 v2(1475,2315) ; U13.3@1496,3811.31 U13.3@1496,3835 ; v2(1535,2695) C87.2@1580,2695 R58.1@1640,2695 ; C104.2@1565,3430 v2(1565,3475) ; R21.2@1605,2090 v2(1645,2090) ; C95.2@1608,3803 1608,3835 U13.3@1496,3835 ; v2(1615,1800) C74.2@1615,1840 ; v2(1645,1456) C82.2@1645,1495 C83.2@1645,1565 ; C79.2@1725,2200 C78.2@1785,2200 v2(1826,2200) ; v2(1795,1456) C93.2@1795,1495 C94.2@1795,1555 R44.2@1795,1615 ; C97.2@1835,2895 C90.2@1835,2835 v2(1880,2835) ; C88.2@1925,1495 1967,1495 v2(1979,1507) 1995,1523 R46.2@1995,1550 ; C91.2@1995,1810 C92.2@2065,1810 v2(2065,1855) ; C2.1@2248,3219 v2(2248,3260) ; C22.1@2856,3631 C15.1@2916,3631 C8.1@2976,3631 C41.1@3036,3631 ; U1.P$2@2857,2932 2984,2932 v2(2996,2932) ; C33.1@3254,3763 3344,3763 ; C69.1@3258,3493 C65.1@3318,3493 C71.1@3378,3493 C70.1@3438,3493 ; v2(3344,3950) 3344,3763 ; C34.1@3434,3763 3344,3763 ; v2(3438,3532) C70.1@3438,3493 ; C40.1@3493,3196 C39.1@3493,3256 R4.2@3493,3316 ; C38.1@3558,3493 C64.1@3498,3493 C70.1@3438,3493 ; C23.1@3643,3316 C37.1@3643,3256 C36.1@3643,3196 C62.1@3643,3136 C63.1@3643,3076 C21.1@3643,3016 3669,2990 v2(3678,2990) ; R12.1@3672,1574 3727,1574 C61.1@3727,1513 ; C84.2@3999,2792 v2(3999,2832) ; C85.2@3999,3168 v2(3999,3208) ; C86.2@3999,3544 v2(3999,3584) ; C68.1@4012,1574 C67.1@4072,1574 C66.1@4132,1574 ; C73.1@4169,2024 C72.1@4169,2084 ; R14.2@4239,2392 v2(4239,2432) ; v2(4528,1288) R51.1@4569,1288 ; PWR_LED.C@4639,1068 v2(4680,1068) ; UBOOT.P$1@1365,3959 v2(1365,3910) R52.2@1365,3855 1390,3855 1410,3835 U13.3@1496,3835
  Bottom w50: 2737,2892 U1.P$2@2816,2892 ; 2737,2932 U1.P$2@2860,2932 ; 2737,2972 U1.P$2@2816,2972 ; 2816,2813 U1.P$2@2816,2892 ; 2816,3043 U1.P$2@2816,2972 ; 2856,2813 U1.P$2@2856,2892 ; 2856,2976 2857,2976 2857,3043 ; U1.P$2@2864,2932 v2@2979,2932 ; 2896,2813 U1.P$2@2896,2892 ; 2896,3043 U1.P$2@2896,2972 ; 2979,2892 U1.P$2@2896,2892 ; 2979,2972 U1.P$2@2896,2972 ; U1.P$2@2816,2892 U1.P$2@2856,2892 ; U1.P$2@2816,2972 U1.P$2@2860,2972 ; U1.P$2@2856,2892 U1.P$2@2860,2892 ; U1.P$2@2860,2892 U1.P$2@2860,2932 ; U1.P$2@2860,2892 U1.P$2@2896,2892 ; U1.P$2@2860,2932 U1.P$2@2860,2972 ; U1.P$2@2860,2972 U1.P$2@2896,2972
  other v1: 2452,1332 2724,1440 3960,1944 4060,2152 1852,2323 1148,2412 2788,2556 1920,2956 2984,3120 3972,3124 2496,3208 3236,3356 3216,3456 2248,3484 2440,3484 2576,3484 3960,3496 3100,3512 3168,3956 3224,3956 3280,3956 2164,4016
  other v2: 1129.92,1044.92 4820.08,1044.92 1069.92,1069.92 1189.92,1069.92 4760.08,1069.92 4880.08,1069.92 1044.92,1129.92 1214.92,1129.92 4735.08,1129.92 4905.08,1129.92 1069.92,1189.92 1189.92,1189.92 4760.08,1189.92 4880.08,1189.92 1129.92,1214.92 4820.08,1214.92 1284,1984 1129.92,4135.08 4820.08,4135.08 1069.92,4160.08 1189.92,4160.08 4760.08,4160.08 4880.08,4160.08 1044.92,4220.08 1214.92,4220.08 4735.08,4220.08 4905.08,4220.08 1069.92,4280.08 1189.92,4280.08 4760.08,4280.08 4880.08,4280.08 1129.92,4305.08 4820.08,4305.08
  other v5: 1129.92,1129.92 4820.08,1129.92 1129.92,4220.08 4820.08,4220.08
LCD_CLK: LCD_CON.31 U1.129 | length 1028
  Top w8: U1.129@2565.66,3359.17 2565.66,3412.66 2616,3463 2616,3657 2984,4025 v1(2984,4036)
  Bottom w8: v1(2984,4036) 2992,4044 3044,4044 LCD_CON.31@3108,4108
  Bottom w40: LCD_CON.31@3108,4108 LCD_CON.31@3125,4125
LCD_D2: LCD_CON.21 LCD_CON.22 LCD_CON.23 U1.148 U6.6 | length 3987.7
  Top w8: v1(2160,3912) 2160,3860 2136,3836 2136,3089 2190.64,3034.36 U1.148@2429.83,3034.36
  Top w10: v1(4032,3740) 4043.2,3728.8 U6.6@4082.11,3728.8
  Top w40: LCD_CON.22@2625,4225 LCD_CON.21@2625,4125 LCD_CON.23@2725,4125
  Bottom w8: LCD_CON.21@2625,4104 2625,4081 2560,4016 2216,4016 2160,3960 v1(2160,3912) 2160,3878 2182,3856 2311,3856 2327,3872 3708,3872 3828,3752 4020,3752 v1(4032,3740)
  Bottom w40: LCD_CON.21@2625,4104 LCD_CON.21@2625,4125
LCD_D3: LCD_CON.24 U1.147 U6.8 | length 3830.1
  Top w8: v1(2184,3888) 2184,3860 2152,3828 2152,3096 2197.89,3050.11 U1.147@2429.83,3050.11
  Top w10: v1(4032,3776) 4035.98,3779.98 U6.8@4082.11,3779.98
  Bottom w8: 2691,4191 2675,4175 2675,4108 2567,4000 2224,4000 2184,3960 v1(2184,3888) 2200,3872 2304,3872 2320,3888 3715,3888 3835,3768 4024,3768 v1(4032,3776)
  Bottom w40: 2691,4191 LCD_CON.24@2725,4225
LCD_D4: LCD_CON.25 U1.146 U6.11 | length 3597.5
  Top w8: v1(2224,3928) 2208,3912 2208,3857 2168,3817 2168,3103 2205.14,3065.86 U1.146@2429.83,3065.86 ; U6.11@3845.89,3831.16 3847.73,3833 3889,3833 v1(3896,3840)
  Bottom w8: LCD_CON.25@2812,4112 2764,4064 2677,4064 2581,3968 2240,3968 2224,3952 v1(2224,3928) 2232,3920 2252,3920 2268,3904 2290,3904 2306,3920 3729,3920 3809,3840 v1(3896,3840)
  Bottom w40: LCD_CON.25@2812,4112 LCD_CON.25@2825,4125
LCD_D5: LCD_CON.26 U1.145 U6.13 | length 3693.1
  Top w8: v1(2232,3896) 2232,3858 2184,3810 2184,3110 2212.39,3081.61 U1.145@2429.83,3081.61 ; U6.13@3845.89,3779.98 3876.02,3779.98 3884,3780 v1(3896,3792)
  Bottom w8: 2791,4191 2775,4175 2775,4107 2748,4080 2670,4080 2574,3984 2232,3984 2200,3952 2200,3916 2220,3896 v1(2232,3896) 2240,3888 2297,3888 2313,3904 3722,3904 3834,3792 v1(3896,3792)
  Bottom w40: 2791,4191 LCD_CON.26@2825,4225
LCD_D6: LCD_CON.27 U1.144 U6.15 | length 3607.2
  Top w8: v1(2252,3944) 2256,3940 2256,3848 v1(2240,3832) 2200,3792 2200,3117 2219.65,3097.35 U1.144@2429.83,3097.35 ; U6.15@3845.89,3728.8 3895.2,3728.8 v1(3896,3728)
  Bottom w8: v1(2240,3832) 2248,3840 2318,3840 2334,3856 3701,3856 3829,3728 v1(3896,3728) ; v1(2252,3944) 2260,3952 2588,3952 2684,4048 2772,4048 2804,4080 2880,4080 2896,4096
  Bottom w40: 2896,4096 LCD_CON.27@2925,4125
LCD_D7: LCD_CON.28 U1.143 U6.17 | length 3719.1
  Top w8: v1(2280,3928) 2280,3828 v1(2268,3816) 2260,3816 2216,3772 2216,3124 2226.9,3113.1 U1.143@2429.83,3113.1 ; U6.17@3845.89,3677.61 3881.61,3677.61 3896,3692 v1(3896,3696)
  Bottom w8: v1(2268,3816) 2276,3824 2325,3824 2341,3840 3694,3840 3838,3696 v1(3896,3696) ; v1(2280,3928) 2288,3936 2595,3936 2691,4032 2780,4032 2812,4064 2932,4064 2975,4107 2975,4175 2959,4191
  Bottom w40: LCD_CON.28@2925,4225 2959,4191
LCD_D10: LCD_CON.13 LCD_CON.14 LCD_CON.15 U1.141 U5.6 | length 3489.1
  Top w8: v1(2268,3784) 2272,3780 2272,3735 2280,3727 2280,3204 2339.4,3144.6 U1.141@2429.83,3144.6
  Top w10: v1(4032,3364) 4043.2,3352.8 U5.6@4082.11,3352.8
  Bottom w8: LCD_CON.13@2208,4108 2136,4036 2136,3879 2231,3784 v1(2268,3784) 2276,3776 2306,3776 2322,3792 2339,3792 2355,3808 3680,3808 3888,3600 3888,3543 3900,3531 3900,3492 4028,3364 v1(4032,3364)
  Bottom w40: LCD_CON.13@2208,4108 LCD_CON.13@2225,4125 ; LCD_CON.14@2225,4225 LCD_CON.13@2225,4125 ; LCD_CON.15@2325,4125 LCD_CON.13@2225,4125
LCD_D11: LCD_CON.16 U1.140 U5.8 | length 3260.6
  Top w8: 2359,4191 2375,4175 2375,4044 2344,4013 2344,3848 v1(2296,3800) 2296,3778 2288,3770 2288,3742 2296,3734 2296,3212 2347.65,3160.35 U1.140@2429.83,3160.35
  Top w10: v1(4032,3396) 4039.98,3403.98 U5.8@4082.11,3403.98
  Top w40: LCD_CON.16@2325,4225 2359,4191
  Bottom w8: v1(2296,3800) 2304,3808 2332,3808 2348,3824 3687,3824 3904,3607 3904,3550 3916,3538 3916,3500 4020,3396 v1(4032,3396)
LCD_D12: LCD_CON.17 U1.139 U5.11 | length 2940.3
  Top w8: LCD_CON.17@2425,4095 2425,4071 2360,4006 2360,3800 v1(2312,3752) 2312,3220 2355.91,3176.09 U1.139@2429.83,3176.09 ; U5.11@3845.89,3455.16 3887.16,3455.16 v1(3892,3460)
  Top w40: LCD_CON.17@2425,4095 LCD_CON.17@2425,4125
  Bottom w8: v1(2312,3752) 2312,3759 2329,3776 2346,3776 2362,3792 3673,3792 3872,3593 3872,3536 3884,3524 3884,3468 v1(3892,3460)
LCD_D13: LCD_CON.18 U1.138 U5.13 | length 3037.8
  Top w8: U1.138@2429.83,3191.84 2364.16,3191.84 2328,3228 2328,3732 v1(2344,3748) 2344,3752 2376,3784 2376,3999 2475,4098 2475,4175 2459,4191 ; U5.13@3845.89,3403.98 3883.98,3403.98 v1(3892,3412)
  Top w40: LCD_CON.18@2425,4225 2459,4191
  Bottom w8: v1(2344,3748) 2344,3751 2369,3776 3666,3776 3856,3586 3856,3529 3868,3517 3868,3436 v1(3892,3412)
LCD_D14: LCD_CON.19 U1.137 U5.15 | length 2906.2
  Top w8: U1.137@2429.83,3207.59 2372.41,3207.59 2344,3236 2344,3703 2376,3735 v1(2376,3748) 2392,3764 2392,3992 LCD_CON.19@2512,4112 ; U5.15@3845.89,3352.8 3887.2,3352.8 v1(3892,3348)
  Top w40: LCD_CON.19@2512,4112 LCD_CON.19@2525,4125
  Bottom w8: v1(2376,3748) 2388,3760 3659,3760 3840,3579 3840,3522 3852,3510 3852,3388 v1(3892,3348)
LCD_D15: LCD_CON.20 U1.136 U5.17 | length 3029.3
  Top w8: U1.136@2429.83,3223.34 2380.66,3223.34 2360,3244 2360,3696 2400,3736 v1(2408,3736) 2408,3985 2503,4080 2544,4080 2575,4111 2575,4175 2559,4191 ; U5.17@3845.89,3301.61 3885.61,3301.61 v1(3892,3308)
  Top w40: LCD_CON.20@2525,4225 2559,4191
  Bottom w8: v1(2408,3736) 2416,3744 3652,3744 3824,3572 3824,3515 3836,3503 3836,3364 v1(3892,3308)
LCD_D18: LCD_CON.5 LCD_CON.6 LCD_CON.7 U1.135 U4.6 | length 3629.9
  Top w8: v1(2384,3596) 2376,3588 2376,3252 2388.91,3239.09 U1.135@2429.83,3239.09
  Top w10: v1(4032,2988) 4043.2,2976.8 U4.6@4082.11,2976.8
  Bottom w8: LCD_CON.7@1940,4110 2040,4010 2040,3837 2245,3632 2348,3632 v1(2384,3596) 2406,3596 2522,3712 3638,3712 3792,3558 3792,3501 3804,3489 3804,3276 3916,3164 3916,3110 4032,2994 v1(4032,2988)
  Bottom w40: LCD_CON.6@1825,4225 LCD_CON.5@1825,4125 LCD_CON.7@1925,4125 LCD_CON.7@1940,4110
LCD_D19: LCD_CON.8 U1.134 U4.8 | length 3489.3
  Top w8: v1(2400,3624) 2408,3616 2408,3586 2392,3570 2392,3260 2397.17,3254.83 U1.134@2429.83,3254.83
  Top w10: v1(4032,3028) U4.8@4082.11,3027.98
  Bottom w8: 1959,4191 1975,4175 1975,4105 2056,4024 2056,3844 2252,3648 2358,3648 2382,3624 v1(2400,3624) 2411,3624 2515,3728 3645,3728 3808,3565 3808,3508 3820,3496 3820,3282.8 3932,3170.8 3932,3117 4021,3028 v1(4032,3028)
  Bottom w40: LCD_CON.8@1925,4225 1959,4191
LCD_D20: LCD_CON.9 U1.133 U4.11 | length 3204.1
  Top w8: v1(2384,3656) 2392,3648 2412,3648 2424,3636 2424,3568 v1(2416,3560) 2408,3552 2408,3270.58 U1.133@2429.83,3270.58 ; U4.11@3845.89,3079.16 3903.16,3079.16 v1(3908,3084)
  Bottom w8: LCD_CON.9@2042,4108 2072,4078 2072,3851 2259,3664 2376,3664 v1(2384,3656) ; v1(2416,3560) 2416,3583 2529,3696 3631,3696 3776,3551 3776,3494 3788,3482 3788,3269 3900,3157 3900,3092 v1(3908,3084)
  Bottom w40: LCD_CON.9@2025,4125 LCD_CON.9@2042,4108
LCD_D21: LCD_CON.10 U1.132 U4.13 | length 3241.2
  Top w8: v1(2412,3672) 2440,3644 2440,3540 v1(2432,3532) 2432,3531.83 2518.42,3445.42 U1.132@2518.42,3359.17 ; U4.13@3845.89,3027.98 3883.98,3027.98 v1(3892,3036)
  Bottom w8: 2059,4191 2075,4175 2075,4101 2088,4088 2088,3858 2266,3680 2404,3680 v1(2412,3672) ; v1(2432,3532) 2440,3540 2440,3584 2536,3680 3624,3680 3760,3544 3760,3487 3772,3475 3772,3262 3884,3150 3884,3044 v1(3892,3036)
  Bottom w40: LCD_CON.10@2025,4225 2059,4191
LCD_D22: LCD_CON.11 U1.131 U4.15 | length 3105.2
  Top w8: v1(2440,3688) 2464,3664 v1(2464,3572) 2456,3564 2456,3531 2534.17,3452.83 U1.131@2534.17,3359.17 ; U4.15@3845.89,2976.8 3887.2,2976.8 v1(3892,2972)
  Bottom w8: LCD_CON.11@2111,4111 2104,4104 2104,3865 2273,3696 2432,3696 v1(2440,3688) ; v1(2464,3572) 2464,3585 2543,3664 3617,3664 3744,3537 3744,3480 3756,3468 3756,3255 3868,3143 3868,2996 v1(3892,2972)
  Bottom w40: LCD_CON.11@2111,4111 LCD_CON.11@2125,4125